# EAGLE board Shield Schematic (EAGLE 9.6.2)
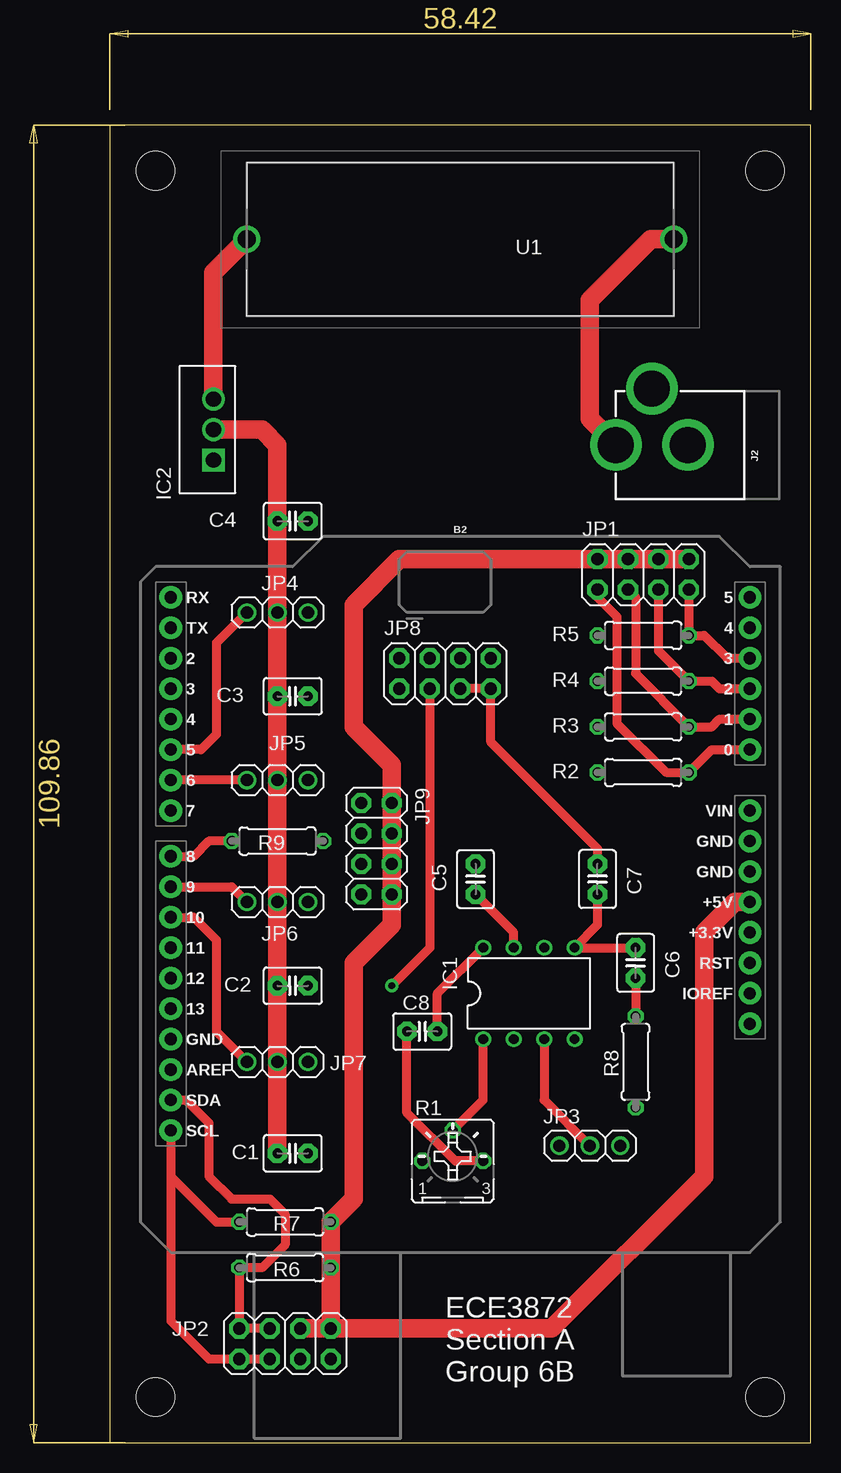
[diagram p0: board, top side]
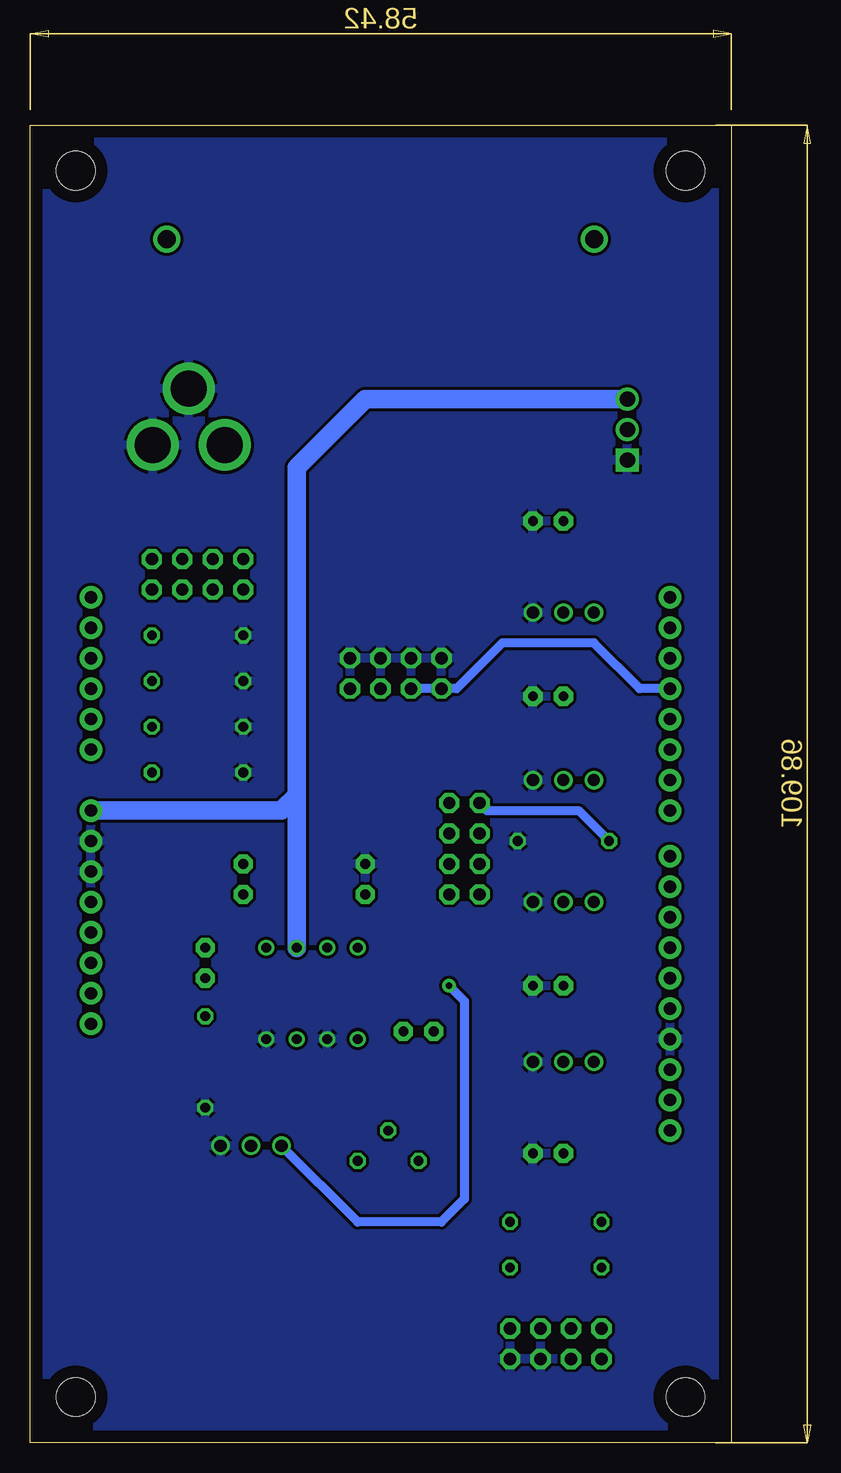
[diagram p1: board, bottom side, seen from below]

Size 58.42 x 109.86 mm. Coordinates in mm from the lower left corner, seen from the top.
Outline: 0,0 58.42,0 58.42,109.86 0,109.86 0,0
Copper layers (1*16): Top 0.035mm / dielectric 1.6mm / Bottom 0.035mm
Design rules "default *": minimum track width 6mil, minimum drill 0.35mm, track to track 6mil, track to pad 6mil, pad to pad 6mil, via to via 6mil, smd to smd 6mil, copper to edge 40mil, drill to drill 6mil, minimum pad ring 10mil, minimum via ring 8mil, stop-mask expansion 4mil, vias tented up to drill 0mil, thermal gap 10mil
Net classes: 1 Signal: width 0.762 mm, clearance 0.152 mm; 2 Power: width 1.524 mm, clearance 0.254 mm; 3 Audio: width 0.762 mm, clearance 0.254 mm
Holes 3.2 mm at 3.81,106.05 54.61,106.05 3.81,3.81 54.61,3.81

## Footprints (pad centres in the part's own frame; a part is rotated, then mirrored left to right if it is on the bottom)
UNO_R3_SHIELD = drill 1.016 pad 1.88: 3.3V 24.13,-2.54; 5V 24.13,0; A0 24.13,12.7; A1 24.13,15.24; A2 24.13,17.78; A3 24.13,20.32; A4 24.13,22.86; A5 24.13,25.4; AREF -24.13,-13.97; D2 -24.13,20.32; D3 -24.13,17.78; D4 -24.13,15.24; D5 -24.13,12.7; D6 -24.13,10.16; D7 -24.13,7.62; D8 -24.13,3.81; D9 -24.13,1.27; D10 -24.13,-1.27; D11 -24.13,-3.81; D12 -24.13,-6.35; D13 -24.13,-8.89; GND@0 24.13,2.54; GND@1 24.13,5.08; GND@2 -24.13,-11.43; IOREF 24.13,-7.62; NC 24.13,-10.16; RES 24.13,-5.08; RX -24.13,25.4; SCL -24.13,-19.05; SDA -24.13,-16.51; TX -24.13,22.86; VIN 24.13,7.62
C2.5-3 = drill 0.813 pad 1.6 octagon: 1 -1.27,0; 2 1.27,0
DIL08 = drill 0.813 pad 1.27: 1 -3.81,-3.81; 2 -1.27,-3.81; 3 1.27,-3.81; 4 3.81,-3.81; 5 3.81,3.81; 6 1.27,3.81; 7 -1.27,3.81; 8 -3.81,3.81
TO254P470X1016X2222-3P = drill 1.27 pad 1.905 square: 1 -5.08,-1.016 | drill 1.27 pad 1.905: 2 -2.54,-1.016; 3 0,-1.016
POWER_JACK_PTH = drill 2.997 pad 4.318: GND 0,7.7; GNDBREAK 4.7,10.7; PWR 0,13.7
2X04 = drill 1.016 pad 1.676 octagon: 1 -3.81,-1.27; 2 -3.81,1.27; 3 -1.27,-1.27; 4 -1.27,1.27; 5 1.27,-1.27; 6 1.27,1.27; 7 3.81,-1.27; 8 3.81,1.27
1X03 = drill 1.016: 1 -2.54,0; 2 0,0; 3 2.54,0
B25P = drill 0.813 octagon: A -2.54,0; E 2.54,0; S 0,2.54
0207/7 = drill 0.813 octagon: 1 -3.81,0; 2 3.81,0
03540101ZXGY = drill 1.5 pad 2.25: 1 -17.8,0; 2 17.8,0

## Placement (x,y rotation side)
B2  ARDUINO_UNO_R3_SHIELDBASIC  [UNO_R3_SHIELD]  29.21,45.09 0 top
C1  [C2.5-3]  15.24,24.13 180 top
C2  [C2.5-3]  15.24,38.1 180 top
C3  [C2.5-3]  15.24,62.23 180 top
C4  [C2.5-3]  15.24,76.83 180 top
C5  [C2.5-3]  30.48,46.99 90 top
C6  [C2.5-3]  43.81,40.01 270 top
C7  [C2.5-3]  40.64,46.99 270 top
C8  [C2.5-3]  26.04,34.29 0 top
IC1  LM386N-1  [DIL08]  34.92,37.47 0 top
IC2  LM1085IT-5.0  [TO254P470X1016X2222-3P]  7.62,87 90 top
J2  POWER_JACK  [POWER_JACK_PTH]  55.88,83.19 90 top
JP1  [2X04]  44.45,72.39 0 top
JP2  [2X04]  14.61,8.26 180 top
JP3  [1X03]  40.01,24.77 0 top
JP4  [1X03]  13.97,69.22 0 top
JP5  [1X03]  13.97,55.24 0 top
JP6  [1X03]  13.97,45.09 0 top
JP7  [1X03]  13.97,31.75 0 top
JP8  [2X04]  27.94,64.14 0 top
JP9  [2X04]  22.23,49.53 270 top
R1  [B25P]  28.57,23.5 0 top
R2  [0207/7]  44.45,55.88 0 top
R3  [0207/7]  44.45,59.69 0 top
R4  [0207/7]  44.45,63.5 0 top
R5  [0207/7]  44.45,67.31 0 top
R6  [0207/7]  14.61,14.61 180 top
R7  [0207/7]  14.61,18.41 180 top
R8  [0207/7]  43.81,31.75 90 top
R9  [0207/7]  13.97,50.16 180 top
U1  03540001ZXGY  [03540101ZXGY]  29.21,100.33 180 top

## Library data of the parts
B2 = SparkFun-Boards
C1-C8 = capacitor-wima
IC1 = linear
IC2 = SamacSys_Parts; ARROW_PART_NUMBER: LM1085IT-5.0; ARROW_PRICE-STOCK: https://www.arrow.com/en/products/lm1085it-5.0/texas-instruments; DESCRIPTION: IC, LDO VOLT REG, 5V, 1.5A; HEIGHT: mm; MANUFACTURER_NAME: Texas Instruments; MANUFACTURER_PART_NUMBER: LM1085IT-5.0; MOUSER_PART_NUMBER: 926-LM1085IT-50; MOUSER_PRICE-STOCK: https://www.mouser.co.uk/ProductDetail/Texas-Instruments/LM1085IT-50?qs=X1J7HmVL2ZGujKIFphWZug%3D%3D
J2 = SparkFun-Connectors; PROD_ID: CONN-08197
JP1-JP9 = adafruit
R1 = pot
R2-R9 = resistor
U1 = SamacSys_Parts; ARROW_PART_NUMBER: 03540001ZXGY; ARROW_PRICE-STOCK: https://www.arrow.com/en/products/03540001zxgy/littelfuse; DESCRIPTION: Littelfuse 30A Panel Mount 6.3 x 32mm Cartridge Fuse Block, 300V ac/dc; HEIGHT: 13mm; MANUFACTURER_NAME: LITTELFUSE; MANUFACTURER_PART_NUMBER: 03540001ZXGY; MOUSER_PART_NUMBER: 576-03540001ZXGY; MOUSER_PRICE-STOCK: https://www.mouser.co.uk/ProductDetail/Littelfuse/03540001ZXGY?qs=2VFNtWizgieffhgauIF6XA%3D%3D

## Nets
+5V_SERVO [Power]: C1.2 C2.2 C3.2 C4.2 IC2.2 JP4.2 JP5.2 JP6.2 JP7.2
+5V_UNO [Power]: B2.5V JP1.2 JP1.4 JP1.6 JP1.8 JP2.1 JP2.3 JP9.2 JP9.4 JP9.6 JP9.8 R6.1 R7.1
+12V [Power]: B2.VIN IC1.6 IC2.3 U1.2
ACTION_BUTTON [Signal]: B2.A3 JP1.7 R5.2
GND [Power]: B2.GND@0 B2.GND@1 B2.GND@2 C1.1 C2.1 C3.1 C4.1 C5.2 IC1.2 IC1.4 IC2.1 J2.GND J2.GNDBREAK JP2.2 JP2.4 JP3.3 JP4.3 JP5.3 JP6.3 JP7.3 JP8.2 JP8.4 JP8.6 JP8.8 R2.1 R3.1 R4.1 R5.1 R8.1 R9.1
N$1 [Power]: J2.PWR U1.1
N$5 [Audio]: C6.1 C7.2 IC1.5
N$8 [Audio]: C6.2 R8.2
N$9 [Audio]: C5.1 IC1.7
N$11 [Audio]: C8.2 IC1.8
N$12 [Audio]: C8.1 R1.E
N$13 [Audio]: IC1.1 R1.S
PLAYLIVE_SWITCH [Signal]: B2.A1 JP1.3 R3.2
PLAYRECORDING_SWITCH [Signal]: B2.A2 JP1.5 R4.2
POT_OUT [Audio]: IC1.3 JP3.2
RECORD_SWITCH [Signal]: B2.A0 JP1.1 R2.2
RESET_BUTTON [Signal]: B2.D8 JP9.1 R9.2
SCL [Signal]: B2.SCL JP2.6 JP2.8 R7.2
SDA [Signal]: B2.SDA JP2.5 JP2.7 R6.2
SERVO1 [Signal]: B2.D5 JP4.1
SERVO2 [Signal]: B2.D6 JP5.1
SERVO3 [Signal]: B2.D9 JP6.1
SERVO4 [Signal]: B2.D10 JP7.1
SPEAKER [Audio]: C7.1 JP8.5 JP8.7
TONE_IN [Audio]: B2.D3 JP3.1 JP8.1 JP8.3

## Tracks (layer width: path | path; a pad name or v marks a point on that pad's centre or on a via)
+5V_SERVO
  Top 1.524: IC2.2 12.7,84.45 13.97,83.19 C4.2 JP4.2 C3.2 JP5.2 JP6.2 C2.2 JP7.2 C1.2
+5V_UNO
  Top 1.524: JP2.3 JP2.1 | JP1.8 JP1.6 JP1.4 JP1.2 24.13,73.66 20.32,69.85 20.32,59.69 23.5,56.52 JP9.2 JP9.4 JP9.6 JP9.8 23.5,43.18 20.32,40.01 20.32,20.32 R7.1 R6.1 JP2.1 | B2.5V 52.07,45.09 49.53,42.55 49.53,22.23 36.83,9.53 JP2.1
+12V
  Top 1.524: U1.2 8.64,97.56 IC2.3
  Bottom 1.524: 36.2,53.98 36.2,81.28 30.48,87 IC2.3 | 36.2,53.98 IC1.6 | B2.VIN 37.47,52.7 36.2,53.98
ACTION_BUTTON
  Top 0.762: B2.A3 51.44,65.41 49.53,67.31 R5.2 JP1.7
GND
  pour Bottom: 0,109.86 0,0 58.42,0 58.42,109.86
N$1
  Top 1.524: J2.PWR 40.01,85.36 40.01,95.25 45.09,100.33 U1.1
N$5
  Top 0.762: C6.1 IC1.5 40.64,43.18 C7.2
N$8
  Top 0.762: C6.2 R8.2
N$9
  Top 0.762: IC1.7 33.66,42.55 C5.1
N$11
  Top 0.762: IC1.8 27.3,37.47 C8.2
N$12
  Top 0.762: C8.1 24.77,27.52 28.79,23.5 R1.E
N$13
  Top 0.762: R1.S 31.11,28.57 IC1.1
PLAYLIVE_SWITCH
  Top 0.762: B2.A1 50.8,60.33 50.16,59.69 R3.2 43.81,64.14 43.81,70.48 JP1.3
PLAYRECORDING_SWITCH
  Top 0.762: B2.A2 50.8,62.87 50.16,63.5 R4.2 45.72,66.04 JP1.5
POT_OUT
  Top 0.762: IC1.3 36.2,28.57 JP3.2
RECORD_SWITCH
  Top 0.762: B2.A0 50.16,57.78 R2.2 46.35,55.88 42.27,59.97 42.27,68.86 40.64,70.48 JP1.1
RESET_BUTTON
  Top 0.762: R9.2 8.26,50.16 6.99,48.9 B2.D8
  Bottom 0.762: R9.2 12.7,52.7 20.32,52.7 JP9.1
SCL
  Top 0.762: JP2.6 JP2.8 8.26,6.99 5.08,10.16 5.08,22.23 | B2.SCL 5.08,22.23 | R7.2 8.89,18.41 5.08,22.23
SDA
  Top 0.762: JP2.5 JP2.7 R6.2 12.7,14.61 14.61,16.51 14.61,19.05 13.34,20.32 10.16,20.32 8.26,22.23 8.26,26.67 6.35,28.57 B2.SDA
SERVO1
  Top 0.762: JP4.1 8.89,66.67 8.89,59.05 7.62,57.78 B2.D5
SERVO2
  Top 0.762: JP5.1 B2.D6
SERVO3
  Top 0.762: B2.D9 10.16,46.35 JP6.1
SERVO4
  Top 0.762: B2.D10 6.99,43.81 8.89,41.91 8.89,34.29 JP7.1
SPEAKER
  Top 0.762: C7.1 40.64,49.53 31.75,58.42 JP8.7 JP8.5
TONE_IN  (via drill 0.55 pad 1.1)
  Top 0.762: v23.5,38.1 26.67,41.27 JP8.3
  Bottom 0.762: B2.D3 7.62,62.87 11.43,66.67 19.05,66.67 22.86,62.87 JP8.1 JP8.3 | v23.5,38.1 22.23,36.83 22.23,20.32 24.13,18.41 31.11,18.41 JP3.1

## Text on the board
tNames: ECE3872 / Section A / Group 6B